# EAGLE board End_Spacer_A (EAGLE 9.5.2)
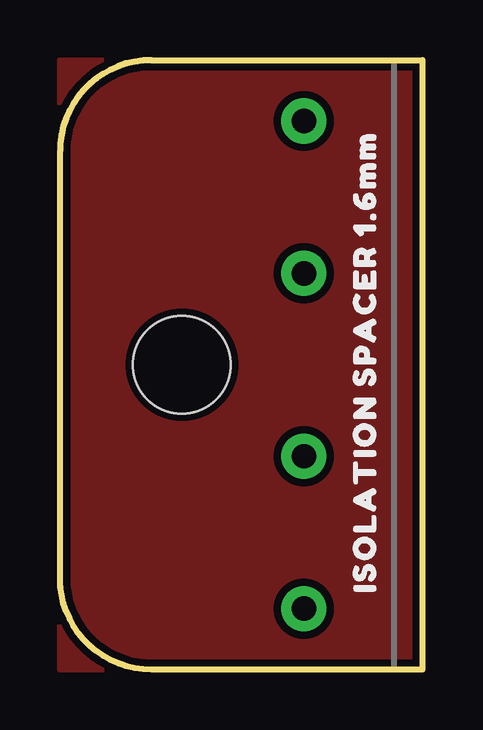
[diagram p0: board, top side]
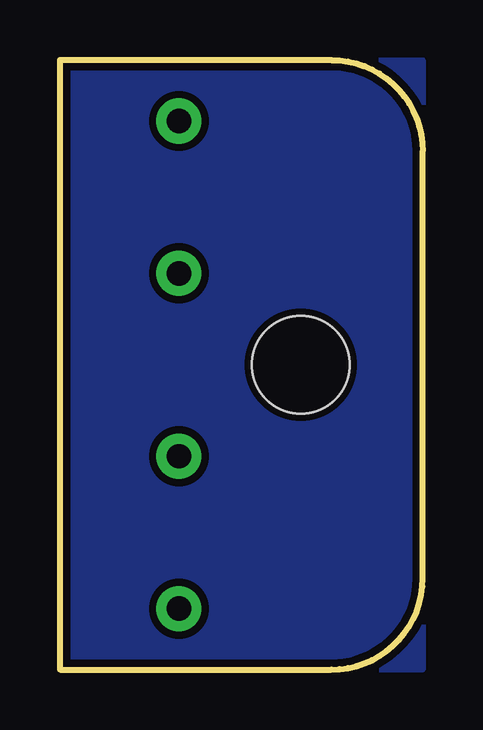
[diagram p1: board, bottom side, seen from below]

Size 15.11 x 25.4 mm. Coordinates in mm from the lower left corner, seen from the top.
Outline: 3.81,25.4 15.11,25.4 15.11,0 3.81,0 arc-90 0,3.81 0,21.59 arc-90 3.81,25.4
Copper layers (1*16): Top 0.035mm / dielectric 1.5mm / Bottom 0.035mm
Design rules "SparkFun-2-Layer-Minimum-JLCPCB": minimum track width 5mil, minimum drill 0.3mm, track to track 5mil, track to pad 5mil, pad to pad 5mil, via to via 5mil, smd to smd 5mil, copper to edge 7mil, drill to drill 7mil, minimum pad ring 5mil, minimum via ring 5mil, stop-mask expansion 4mil, vias tented up to drill 25mil, thermal gap 10mil
Holes 4.06 mm at 5.08,12.7

## Placement (x,y rotation side)
E$2  [ISOLATION_SPACER_1#6MM0]  12.7,2.54 90 top

## Library data of the parts
E$2 = output

## Tracks (layer width: path | path; a pad name or v marks a point on that pad's centre or on a via)
GND
  pour Top (isolate 0.305): 0,25.4 15.11,25.4 15.11,0 0,0
  pour Bottom (isolate 0.305): 0,25.4 0,0 15.24,0 15.24,25.4
N$48  (via drill 1.02 pad 1.88)
  other vias: 10.16,2.54
N$49  (via drill 1.02 pad 1.88)
  other vias: 10.16,22.86
N$50  (via drill 1.02 pad 1.88)
  other vias: 10.16,16.51
N$51  (via drill 1.02 pad 1.88)
  other vias: 10.16,8.89